# Altium PCB Telemetry.PcbDoc
Units mil, origin at the board's own origin, x right, y up, seen from the top; angles counter-clockwise.
Board outline 6000 x 4000 mil, 2 copper layers (Top Layer, Bottom Layer); 12 components, 8 nets, 234 pads, 0 vias.
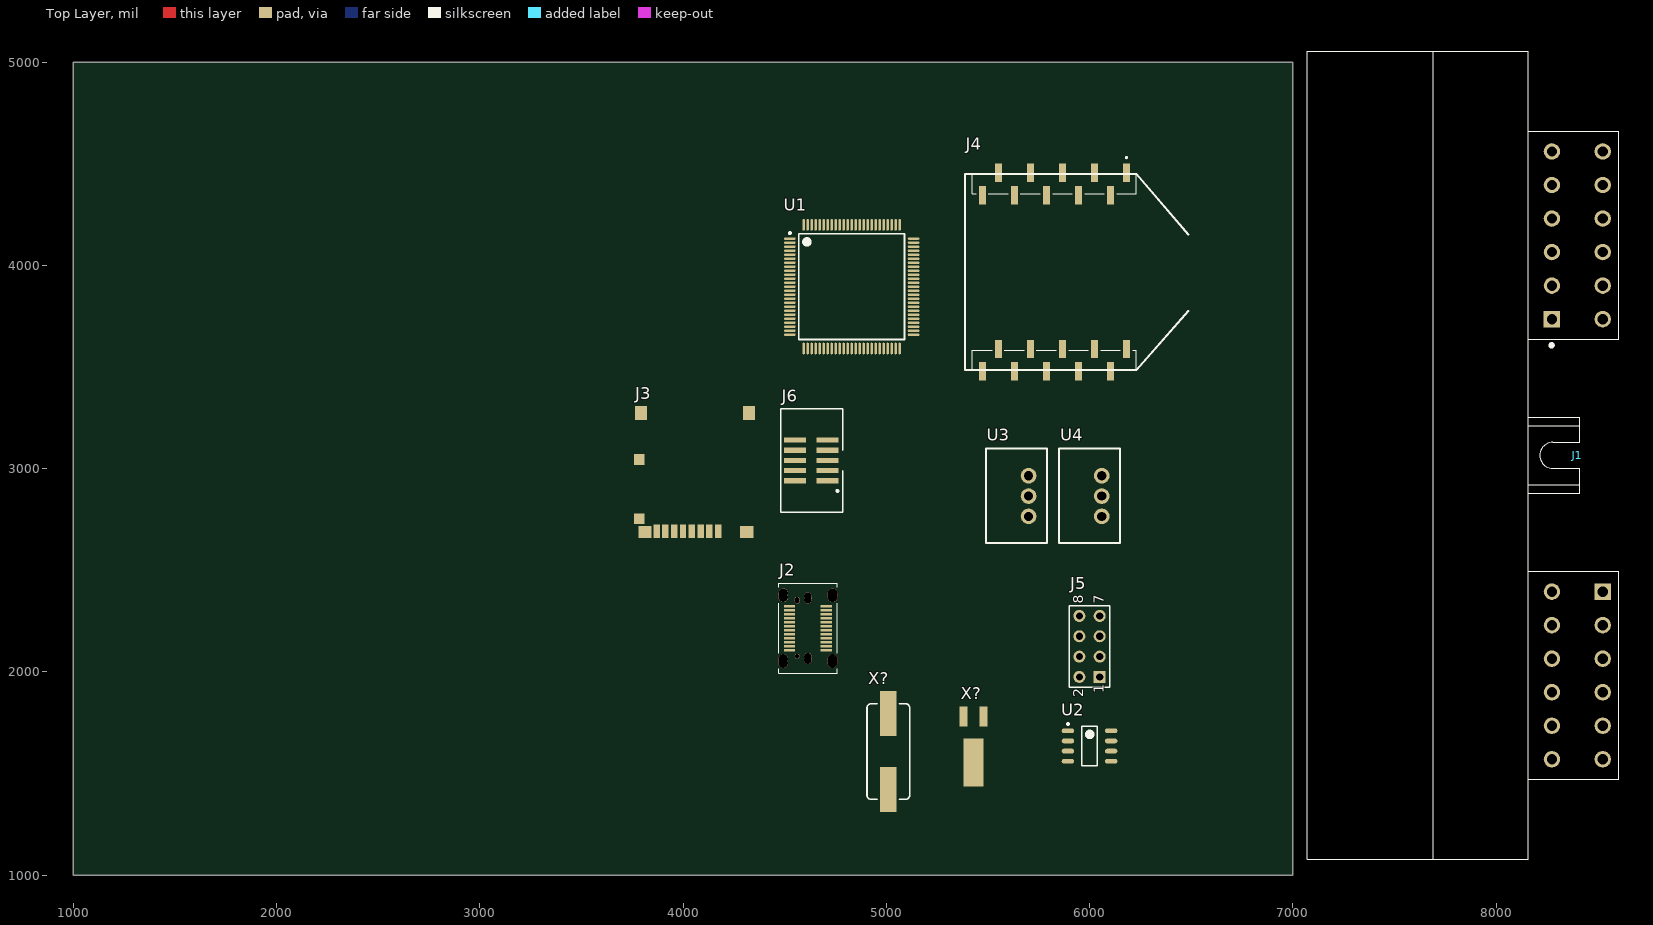
[diagram p0: Top Layer view]
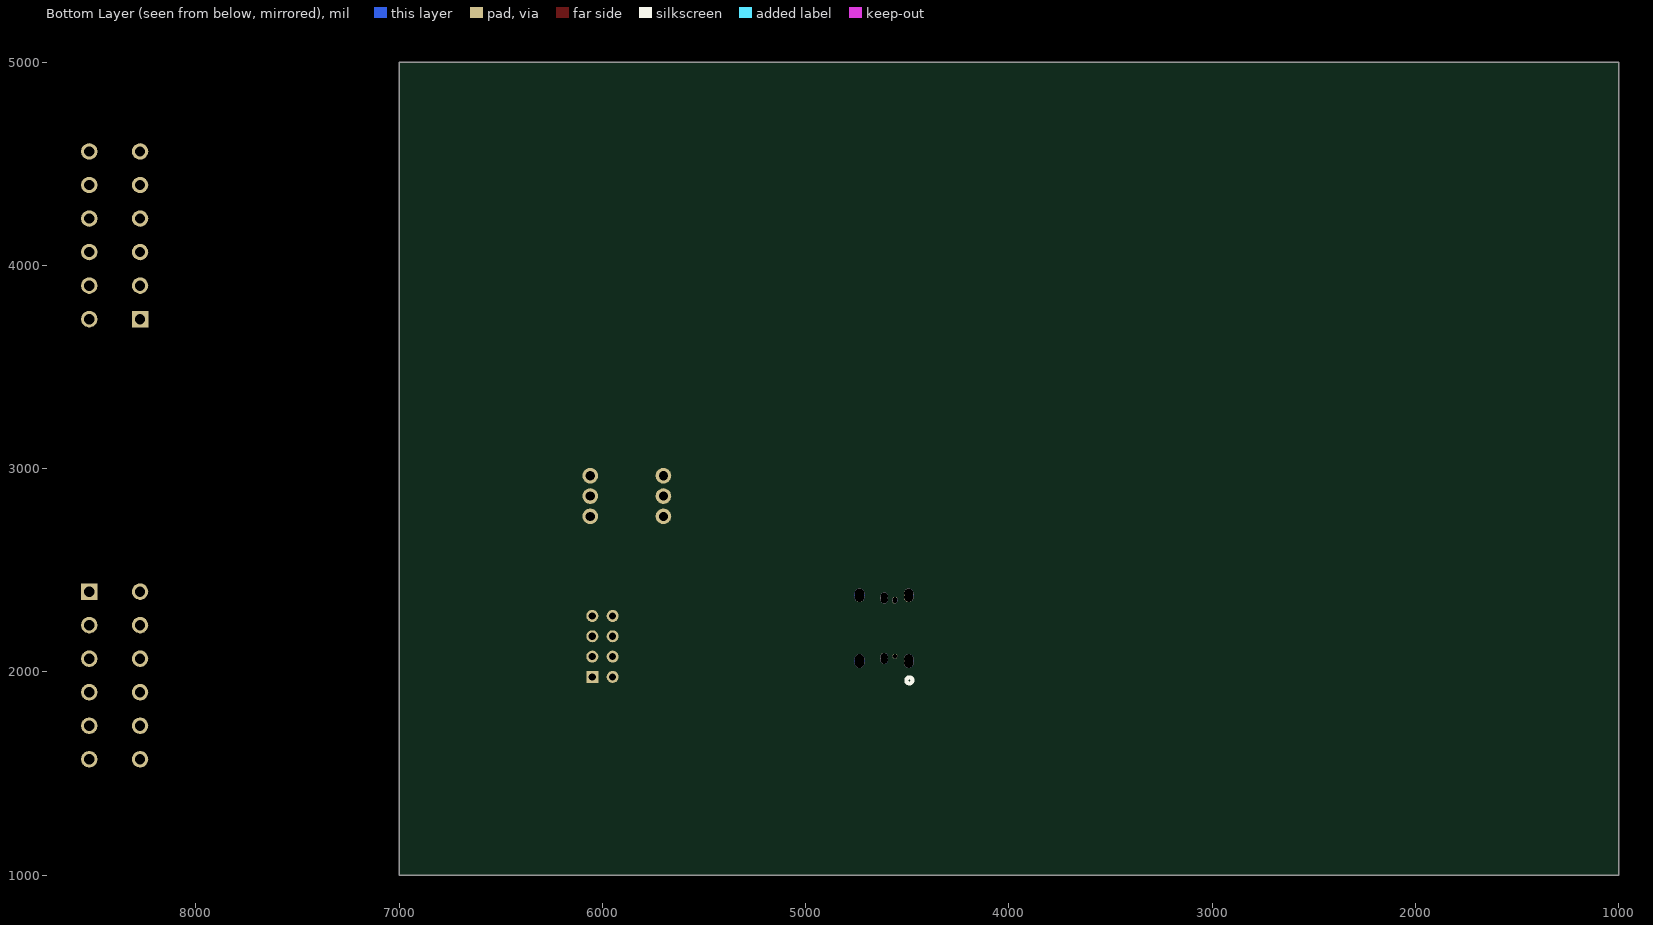
[diagram p1: Bottom Layer view, seen from below]

## Layer stack, top to bottom
Top Solder: solder mask 0.4, Solder Resist, Dk 3.5
Top Layer: signal copper 1.4
Dielectric 1: dielectric 12.6, FR-4, Dk 4.8
Bottom Layer: signal copper 1.4
Bottom Solder: solder mask 0.4, Solder Resist, Dk 3.5

## Board outline
1000,1000 7000,1000 7000,5000 1000,5000

## Design rules (kind name [scope] priority, off if disabled: settings)
Clearance [All] p1: gap=10 ignorepadtopadclearanceinfootprint=FALSE except(0: Arc-Hole Track-Hole SMDPad-Hole THPad-Hole Via-Hole Fill-Hole Poly-Hole Region-Hole Text-Hole)
PolygonConnect [All] p1: connectstyle=Relief reliefconductorwidth=10 reliefentries=4 polygonreliefangle="90 Angle" airgapwidth=10
RoutingVias [All] p1: holewidth=28 width=50 viastyle="Through Hole" minholewidth=28 minwidth=50 maxholewidth=28 maxwidth=50
SolderMaskExpansion [All] p1: expansion=4 istentingtop=FALSE
Width [All] p1: maxlimit=10 minlimit=10 preferedwidth=10
30 further rules are at their usual default settings.

## Classes and differential pairs
component class power_if: U3 U4
component class esp_if: J5
component class usb_if: J2
component class sd_if: J3
component class program_if: J6 X?
component class xbee_if: J4
component class can_if: J1 U2
component class mcu_if: U1

## Components (designator, comment, footprint, x,y, rotation, side; value= is the part's Value field where it differs from the comment)
J1 "DTM1312PA12PBR008" TE_DTM1312PA12PBR008 8352.17,3065.16 r270 top
J2 "DX07S024WJ1R350" DX07S024WJ1R350-Footprint-1 4705,2323.11 r90 top
J3 "J_5027740891" "usd slot 5027740891" 3793.27,3273.35 r0 top
J4 "XBP9B-DMST-002" XBP9B-DMST-002-Footprint-1 5826.89,4399.92 r270 top
J5 "Header 4X2" HDR2X4 6050,1975 r90 top
J6 "3221-10-0300-00" 3221-10-0300-00-Footprint-1 4710,2940 r90 top
U1 "STM32G473VET6" TSQFP50P1600X1600X160-100N 4830,3895 r0 top
U2 "TCAN337GD" TCAN337GD-Footprint-1 6000,1635 r0 top
U3 "U_R-785.0-0.5" SIP3 5700,2765 r90 top
U4 "U_R-78C3.3-1.0" SIP3 6060,2765 r90 top
X? "ABLS-8.000MHZ-K4T" ABLS-8.000MHZ-K4T-Footprint-1 5010,1421 r90 top
X? "AB26TRB-32.768KHZ-T" X_2.1mm_RADIAL_CRYSTAL 5430,1555 r90 top

## Footprints (in the part's own frame and the unit in brackets; to place one, negate y for a bottom-side part, rotate by r counter-clockwise, add the part's x,y. Pads: shape width x height; smd on the part's side, far side on the other; paste and mask are expansions set on the pad)
3221-10-0300-00-Footprint-1 [mm]
  rect 0.65x2.76 smd: 1(0,0) 2(0,4.04) 3(1.27,0) 4(1.27,4.04) 5(2.54,0) 6(2.54,4.04) 7(3.81,0) 8(3.81,4.04) 9(5.08,0) 10(5.08,4.04)
  silkscreen extent -3.94,-1.91 9.02,5.84, body extent -3.78,-0.73 8.86,4.77, height 5.63
ABLS-8.000MHZ-K4T-Footprint-1 [mil]
  rect 220x83 smd: 1(0,0) 2(374,0)
  silkscreen extent -48,-105 422,105, body extent -63,-92 437,93, height 160
DX07S024WJ1R350-Footprint-1 [mil]
  round 24 hole 24 unplated: 25(-246.06,143.78)
  round 47.24 hole 47.24 unplated: 27(-259.84,211.42) 28(43.3,211.42) 29(62.99,211.42) 36(-279.53,-30.24) 37(-259.84,-30.24) 38(43.3,-30.24) 39(62.99,-30.24) S_9_H2(-279.53,211.42)
  round 23.62 hole 23.62 unplated: 30(24.61,143.78) 31(34.45,143.78)
  round 37.4 hole 37.4 unplated: 32(-264.76,90.55) 33(-249.01,90.55) 34(32.48,90.55) 35(48.23,90.55)
  rect 11x55 smd paste+0 mask+0: A1(-216.54,181.1) A2(-196.85,181.1) A3(-177.17,181.1) A4(-157.48,181.1) A5(-137.8,181.1) A6(-118.11,181.1) A7(-98.43,181.1) A8(-78.74,181.1) A9(-59.06,181.1) A10(-39.37,181.1) A11(-19.68,181.1) A12(0,181.1) B1(0,0) B2(-19.68,0) B3(-39.37,0) B4(-59.06,0) B5(-78.74,0) B6(-98.43,0) B7(-118.11,0) B8(-137.8,0) B9(-157.48,0) B10(-177.17,0) B11(-196.85,0) B12(-216.54,0)
  Multi-Layer lines w23.62: 24.61,143.78 34.45,143.78
  Multi-Layer lines w37.4: -264.76,90.55 -249.01,90.55 ; 32.48,90.55 48.23,90.55
  Multi-Layer lines w47.24: -279.53,211.42 -259.84,211.42 ; 43.3,211.42 62.99,211.42 ; -279.53,-30.24 -259.84,-30.24 ; 43.3,-30.24 62.99,-30.24
  silkscreen extent -330,-53 113,233, body extent -325,-47 108,228, height 473
HDR2X4 [mm] "Connector; Header; 4x2 Position"
  rect 1.5x1.5 hole 0.9: 1(0,0)
  round 1.5 hole 0.9: 2(0,2.54) 3(2.54,0) 4(2.54,2.54) 5(5.08,0) 6(5.08,2.54) 7(7.62,0) 8(7.62,2.54)
  silkscreen extent -1.27,-1.27 8.89,3.81
SIP3 [mm]
  oval 1.95x1.96 hole 1.15: 1(0,0) 2(2.54,0) 3(5.08,0)
  silkscreen extent -3.3,-2.29 8.51,5.33, body extent -3.46,-2.25 8.66,5.3, height 10.2
TCAN337GD-Footprint-1 [mm]
  oval 1.55x0.6 smd: 1(-2.7,1.905) 2(-2.7,0.635) 3(-2.7,-0.635) 4(-2.7,-1.905) 5(2.7,-1.905) 6(2.7,-0.635) 7(2.7,0.635) 8(2.7,1.905)
  silkscreen extent -2.82,-2.45 0.97,2.88, body extent -3.02,-2.46 2.98,2.48, height 1.55
TE_DTM1312PA12PBR008 [mm]
  rect 2.056x2.056 hole 1.294: A1(-17.025,-1.96) B1(17.025,4.39)
  round 2.056 hole 1.294: A2(-21.215,-1.96) A3(-25.405,-1.96) A4(-29.595,-1.96) A5(-33.785,-1.96) A6(-37.975,-1.96) A7(-37.975,4.39) A8(-33.785,4.39) A9(-29.595,4.39) A10(-25.405,4.39) A11(-21.215,4.39) A12(-17.025,4.39) B2(21.215,4.39) B3(25.405,4.39) B4(29.595,4.39) B5(33.785,4.39) B6(37.975,4.39) B7(37.975,-1.96) B8(33.785,-1.96) B9(29.595,-1.96) B10(25.405,-1.96) B11(21.215,-1.96) B12(17.025,-1.96)
  silkscreen extent -50.5,-32.52 50.5,6.39, body extent -58.99,-30.61 59.75,104.14, height 25.81
TSQFP50P1600X1600X160-100N [mm] "TSQFP, 100-Leads, Body 14.00x14.00mm, Pitch 0.50mm, IPC Medium Density"
  oval 1.45x0.3 smd: 1(-7.725,6) 2(-7.725,5.5) 3(-7.725,5) 4(-7.725,4.5) 5(-7.725,4) 6(-7.725,3.5) 7(-7.725,3) 8(-7.725,2.5) 9(-7.725,2) 10(-7.725,1.5) 11(-7.725,1) 12(-7.725,0.5) 13(-7.725,0) 14(-7.725,-0.5) 15(-7.725,-1) 16(-7.725,-1.5) 17(-7.725,-2) 18(-7.725,-2.5) 19(-7.725,-3) 20(-7.725,-3.5) 21(-7.725,-4) 22(-7.725,-4.5) 23(-7.725,-5) 24(-7.725,-5.5) 25(-7.725,-6) 51(7.725,-6) 52(7.725,-5.5) 53(7.725,-5) 54(7.725,-4.5) 55(7.725,-4) 56(7.725,-3.5) 57(7.725,-3) 58(7.725,-2.5) 59(7.725,-2) 60(7.725,-1.5) 61(7.725,-1) 62(7.725,-0.5) 63(7.725,0) 64(7.725,0.5) 65(7.725,1) 66(7.725,1.5) 67(7.725,2) 68(7.725,2.5) 69(7.725,3) 70(7.725,3.5) 71(7.725,4) 72(7.725,4.5) 73(7.725,5) 74(7.725,5.5) 75(7.725,6)
  oval 0.3x1.45 smd: 26(-6,-7.725) 27(-5.5,-7.725) 28(-5,-7.725) 29(-4.5,-7.725) 30(-4,-7.725) 31(-3.5,-7.725) 32(-3,-7.725) 33(-2.5,-7.725) 34(-2,-7.725) 35(-1.5,-7.725) 36(-1,-7.725) 37(-0.5,-7.725) 38(0,-7.725) 39(0.5,-7.725) 40(1,-7.725) 41(1.5,-7.725) 42(2,-7.725) 43(2.5,-7.725) 44(3,-7.725) 45(3.5,-7.725) 46(4,-7.725) 47(4.5,-7.725) 48(5,-7.725) 49(5.5,-7.725) 50(6,-7.725) 76(6,7.725) 77(5.5,7.725) 78(5,7.725) 79(4.5,7.725) 80(4,7.725) 81(3.5,7.725) 82(3,7.725) 83(2.5,7.725) 84(2,7.725) 85(1.5,7.725) 86(1,7.725) 87(0.5,7.725) 88(0,7.725) 89(-0.5,7.725) 90(-1,7.725) 91(-1.5,7.725) 92(-2,7.725) 93(-2.5,7.725) 94(-3,7.725) 95(-3.5,7.725) 96(-4,7.725) 97(-4.5,7.725) 98(-5,7.725) 99(-5.5,7.725) 100(-6,7.725)
  silkscreen extent -7.85,-6.6 6.6,6.82, body extent -8,-8 8,8, height 1.6
"usd slot 5027740891" [mm]
  rect 0.8x1.68 smd: 1(9.65,-14.76) 2(8.55,-14.76) 3(7.45,-14.76) 4(6.35,-14.76) 5(5.25,-14.76) 6(4.15,-14.76) 7(3.05,-14.76) 8(1.95,-14.76)
  rect 1.29x1.3 smd: 9(-0.21,-13.2)
  rect 1.29x1.4 smd: 10(-0.21,-5.8)
  rect 1.5x1.7 smd: P(0,0) P(13.5,0)
  rect 1.6x1.5 smd: P(0.51,-14.85)
  rect 1.7x1.5 smd: P(13.2,-14.85)
  body extent -0.45,-15.3 13.85,0.7, height 1.76
X_2.1mm_RADIAL_CRYSTAL [mm] "2.1mm radial crystal"
  rect 6x2.5 smd: 0(0,0)
  rect 2.5x1 smd: 1(5.75,-1.25) 2(5.75,1.25)
  body extent -2.5,-1.4 6.5,1.4, height 2
XBP9B-DMST-002-Footprint-1 [mm]
  rect 2.29x0.89 smd: 1(-1.395,9) 2(1.395,7) 3(-1.395,5) 4(1.395,3) 5(-1.395,1) 6(1.395,-1) 7(-1.395,-3) 8(1.395,-5) 9(-1.395,-7) 10(1.395,-9) 11(23.391,-9) 12(20.601,-7) 13(23.391,-5) 14(20.601,-3) 15(23.391,-1) 16(20.601,1) 17(23.391,3) 18(20.601,5) 19(23.391,7) 20(20.601,9)
  silkscreen extent -3.4,-11.18 23.24,16.76, body extent -2,-11.14 24,26.23, height 10.29

## Part data
J1: library part CMP-002-00081-2, "24 way sealed A and B key PCB header with .165 inch/4.2 millimeter centerline pitch.", Case/Package=None, Component Type=Standard, Design Item ID=DTM1312PA12PBR008, Digi-Key_Part_Number=1734-1131-ND, Digi-Key_Purchase_URL=https://www.digikey.com/product-detail/en/te-connectivity-deutsch-connectors/DTM13-12PA-12PB-R008/1734-1131-ND/6566695?utm_source=snapeda&utm_medium=aggregator&utm_campaign=symbol, MF="TE Connectivity", MP=DTM13-12PA-12PB-R008, Pins=24, SnapEDA_Link=https://www.snapeda.com/parts/DTM13-12PA-12PB-R008/TE%20Connectivity%20Deutsch%20Connectors/view-part/490507/?ref=snap, Source=SnapEDAsch.SchLib, TE_purchase_URL=https://www.te.com/usa-en/product-DTM1312PA12PBR008.html?te_bu=Cor&te_type=disp&te_campaign=seda_glo_cor-seda-global-disp-prtnr-fy19-seda-model-bom-cta_sma-317_1&elqCampaignId=32493
J2: library part CMP-002-00075-3, "Vertical Mount Type C receptacle; 12mm Height"
J3: library part CMP-142-000000-4, "CONN MICRO SD CARD PUSH-PUSH R/A", Max Current Rating=500mA, Gender=Female, Mounting Technology=SMT, Pins=12
J4: library part CMP-00025-00003-1, "802.15.4 LR-WPAN SOC 928MHz 200Kbps"
J5: "Header, 4-Pin, Dual row", LatestRevisionDate=17-Jul-2002, LatestRevisionNote="Re-released for DXP Platform.", Publisher="Altium Limited"
J6: library part CMP-002-00077-1, "JTAG STLINK CONN HEADER SMD 10POS 1.27MM"
U1: library part CMP-00014-4, "RISC Microcontroller, 32-Bit, 170MHz", Case/Package=LQFP100, Frequency=170Hz, Nominal Supply Voltage=3.3V, Interface=JTAG, Mounting Technology=SMD, PartId=2, Pins=100, RAM Size=128, RoHS Compliant=Yes
U2: library part CMP-015-00008-1, "3.3-V CAN Transceivers with CAN FD (Flexible Data Rate) 8-SOIC -40 to 125 +-"
U3: library part CMP-110-000001-1, "IC REG 0.5A 5.0V", Manufacturer="Recom Power", Manufacturer PN=R-785.0-0.5, ComponentLink1Description=Datasheet, ComponentLink1URL=http://www.digikey.com/product-search/en?vendor=0&keywords=R-785.0-0.5, Design Item ID=U_R-785.0-0.5, Known Distributors=Digikey, Price=6.81, Source=Common.SchLib, SVP Creator="Vivien Wang"
U4: library part CMP-093-000004-1, "IC REG 1A 3.3V", Current - Output (Max)=1A, Manufacturer="Recom Power", Manufacturer PN=R-78C3.3-1.0, Voltage - Input (Max)=42V, Voltage - Input (Min)=7V, Voltage - Output 1=3.3V, Design Item ID=U_R-78C3.3-1.0, Efficiency=89%, Size / Dimension="0.45\" L x 0.30\" W x 0.40\" H (11.5mm x 7.5mm x 10.2mm)", Source=BP_Control.SchLib, SVP Creator="Vivien Wang"
X?: library part CMP-003-00030-1, "ABRACON         ABLS-8.000MHZ-K4T             CRYSTAL, 8MHZ, 18PF, HC-49US"
X?: library part CMP-046-000002-2, "CRYSTAL 32.7680KHZ 12.5PF SMD", Design Item ID=X_32.768kHz_CRYSTAL, Source=misc.SchLib

## Nets (pads, with @x,y where several pads share a name; then routed paths per layer and width w, separated by ;. In a path a pad name is that pad's centre, name@x,y a point inside that pad or via, vN(x,y) a via of type N, cw(c..) or ccw(c..) an arc to the next point about the centre after c; other vN are vias at no path point)
CH_PD: J5.3
GND: J5.2
GPIO0: J5.6
GPIO2: J5.4
RESET: J5.5
RX: J5.8
TX: J5.1
VCC: J5.7
pads on no net: J1.A1 J1.A2 J1.A3 J1.A4 J1.A5 J1.A6 J1.A7 J1.A8 J1.A9 J1.A10 J1.A11 J1.A12 J1.B1 J1.B2 J1.B3 J1.B4 J1.B5 J1.B6 J1.B7 J1.B8 J1.B9 J1.B10 J1.B11 J1.B12 J2.25 J2.27 J2.28 J2.29 J2.30 J2.31 J2.32 J2.33 J2.34 J2.35 J2.36 J2.37 J2.38 J2.39 J2.A1 J2.A2 J2.A3 J2.A4 J2.A5 J2.A6 J2.A7 J2.A8 J2.A9 J2.A10 J2.A11 J2.A12 J2.B1 J2.B2 J2.B3 J2.B4 J2.B5 J2.B6 J2.B7 J2.B8 J2.B9 J2.B10 J2.B11 J2.B12 J2.S_9_H2 J3.1 J3.2 J3.3 J3.4 J3.5 J3.6 J3.7 J3.8 J3.9 J3.10 J3.P J4.1 J4.2 J4.3 J4.4 J4.5 J4.6 J4.7 J4.8 J4.9 J4.10 J4.11 J4.12 J4.13 J4.14 J4.15 J4.16 J4.17 J4.18 J4.19 J4.20 J6.1 J6.2 J6.3 J6.4 J6.5 J6.6 J6.7 J6.8 J6.9 J6.10 U1.1 U1.2 U1.3 U1.4 U1.5 U1.6 U1.7 U1.8 U1.9 U1.10 U1.11 U1.12 U1.13 U1.14 U1.15 U1.16 U1.17 U1.18 U1.19 U1.20 U1.21 U1.22 U1.23 U1.24 U1.25 U1.26 U1.27 U1.28 U1.29 U1.30 U1.31 U1.32 U1.33 U1.34 U1.35 U1.36 U1.37 U1.38 U1.39 U1.40 U1.41 U1.42 U1.43 U1.44 U1.45 U1.46 U1.47 U1.48 U1.49 U1.50 U1.51 U1.52 U1.53 U1.54 U1.55 U1.56 U1.57 U1.58 U1.59 U1.60 U1.61 U1.62 U1.63 U1.64 U1.65 U1.66 U1.67 U1.68 U1.69 U1.70 U1.71 U1.72 U1.73 U1.74 U1.75 U1.76 U1.77 U1.78 U1.79 U1.80 U1.81 U1.82 U1.83 U1.84 U1.85 U1.86 U1.87 U1.88 U1.89 U1.90 U1.91 U1.92 U1.93 U1.94 U1.95 U1.96 U1.97 U1.98 U1.99 U1.100 U2.1 U2.2 U2.3 U2.4 U2.5 U2.6 U2.7 U2.8 U3.1 U3.2 U3.3 U4.1 U4.2 U4.3 X?.0 X?.1 X?.2

## Text inside footprints (layer, text, board x,y; h text height)
J5: Top Overlay "2" at 5970,1875 h50 r90; Top Overlay "1" at 6070,1895 h50 r90; Top Overlay "7" at 6070,2335 h50 r90; Top Overlay "8" at 5970,2335 h50 r90